# EAGLE board TopPanelV3.2 (EAGLE 7.3.0)
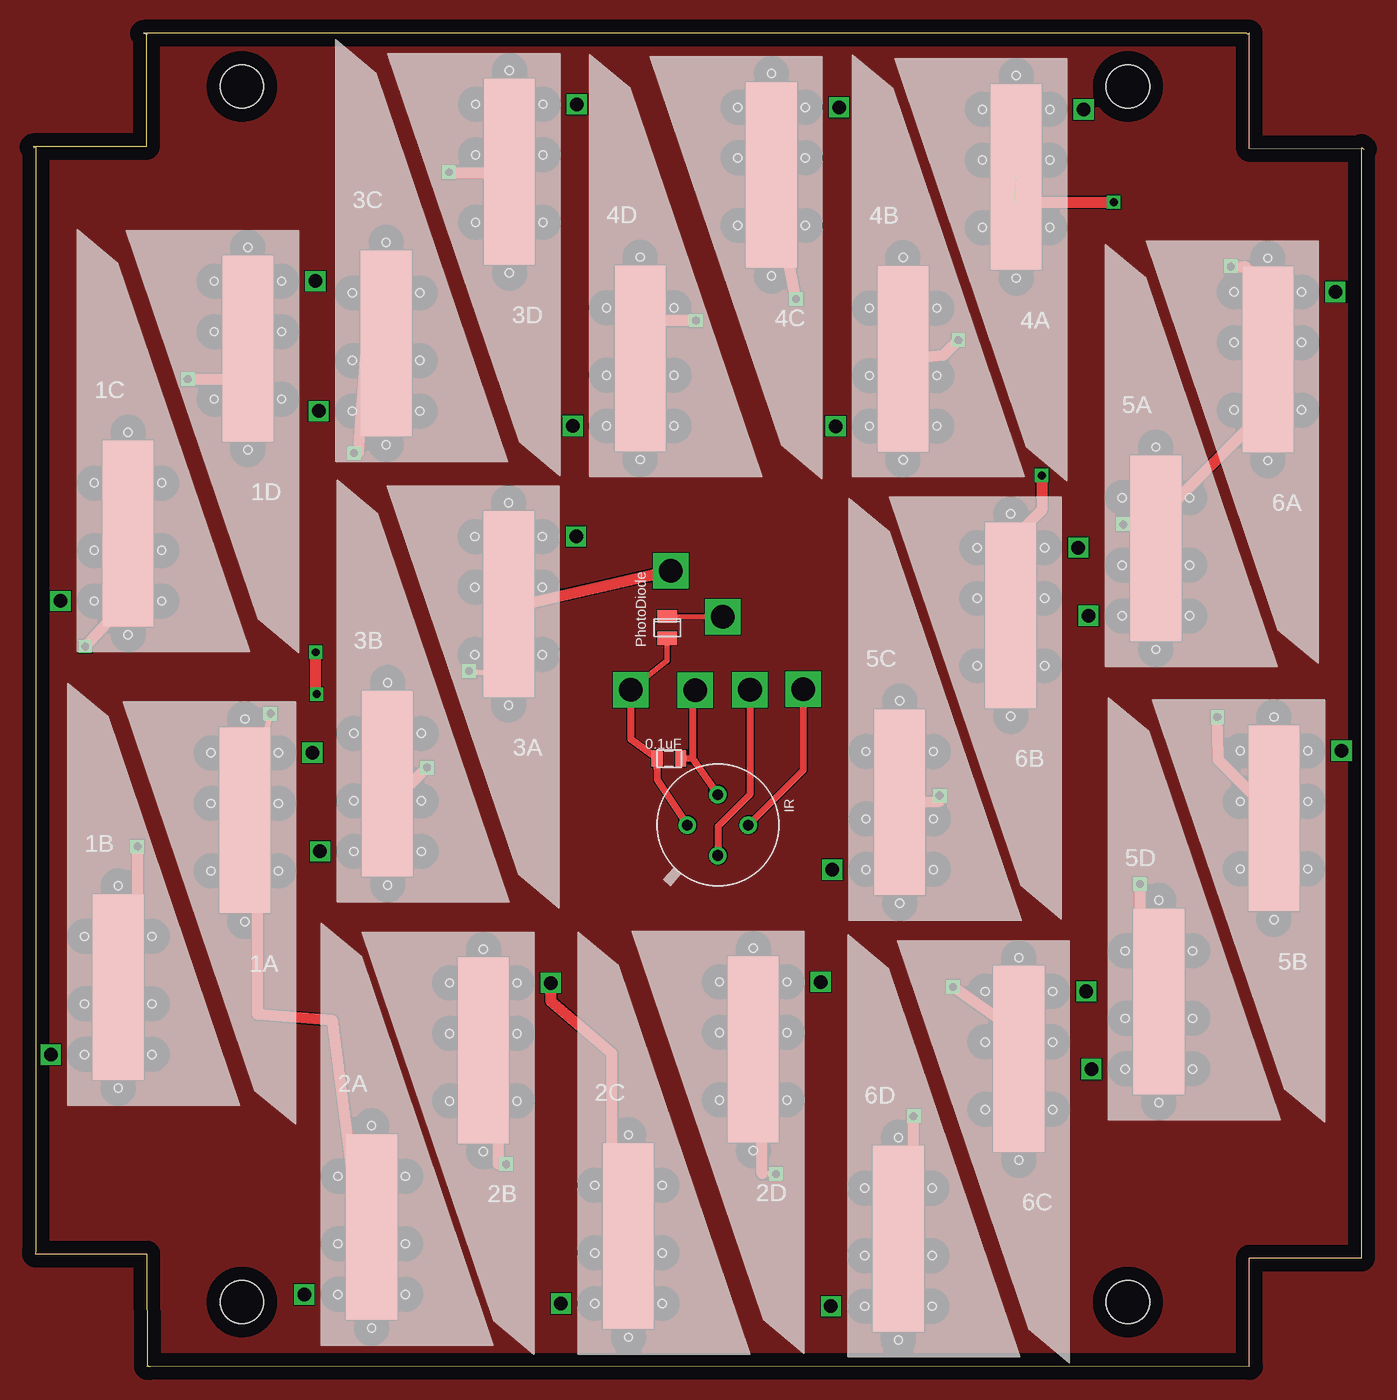
[diagram p0: board, top side]
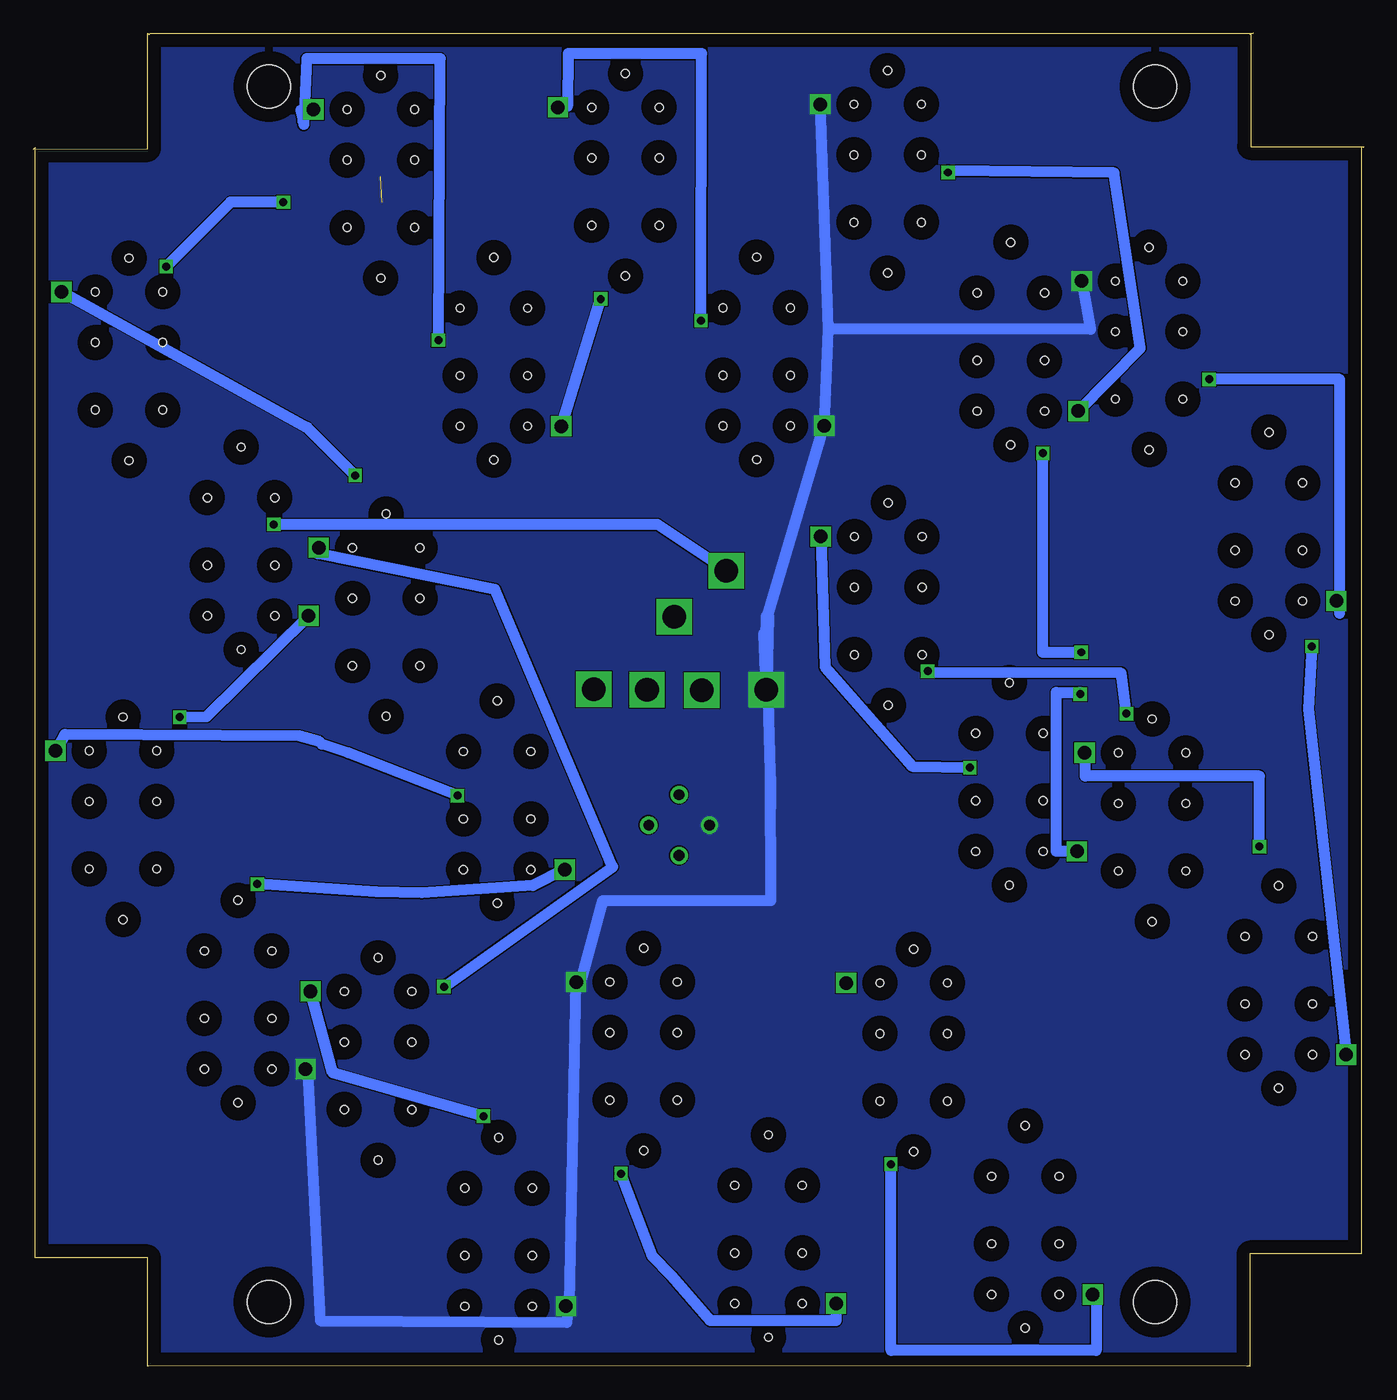
[diagram p1: board, bottom side, seen from below]

Size 100.15 x 100.35 mm. Coordinates in mm from the lower left corner, seen from the top.
Outline: 100,8.15 91.54,8.15 91.54,0 91.49,0.05 8.79,0 8.66,0 8.64,0.02 8.61,0.02 8.59,0 8.56,8.46 0.75,8.46 0.45,8.45 0.17,8.46 0.18,8.66 0.18,91.82 0.05,91.72 0.05,91.75 0,91.8 8.51,91.81 8.49,100.32 8.53,100.28 8.59,100.28 8.31,100.33 91.34,100.33 91.39,100.28 91.47,100.28 91.53,100.34 91.54,91.66 100.15,91.62
Outline: 100,8.15 100,8.15
Outline: 100,8.15 100,91.75 100.15,91.62
Outline: 100.15,91.62 100.15,91.62
Copper layers (1*16): Top 0.035mm / dielectric 1.5mm / Bottom 0.035mm
Design rules "default *": minimum track width 40mil, minimum drill 24mil, track to track 2mil, track to pad 2mil, pad to pad 8mil, via to via 8mil, smd to smd 8mil, copper to edge 40mil, drill to drill 8mil, minimum pad ring 10mil, minimum via ring 8mil, stop-mask expansion 4mil, vias tented up to drill 0mil, thermal gap 10mil
Holes 3.26 mm at 15.7,4.83 82.4,4.83 82.4,96.33 15.7,96.33

## Footprints (pad centres in the part's own frame; a part is rotated, then mirrored left to right if it is on the bottom)
SOLARCELL = smd 3.81 x 13.97: ANODE 5.08,10.16 | drill 1.016 square: CATHODE 0,5.08 | hole 0.6: 7.62,5.08; 5.08,2.54; 7.62,8.89; 5.08,17.78; 2.54,13.97; 2.54,8.89; 7.62,13.97; 2.54,5.08
0805 = smd 0.8 x 1.2: 1 -0.9,0; 2 0.9,0
MXL90614 = drill 0.8: SCL 2.293,0; VDD -2.293,0; VSS 0,-2.294 | drill 0.8 pad 1.2: SDA 0,2.294
PHOTODECTORDEVICE2 = smd 1 x 1.45: GND 0.76,0.4; PWROUT -0.88,0.4

## Placement (x,y rotation side)
1A  SOLARCELL  [SOLARCELL]  21.01,51.26 180 top
1B  SOLARCELL  [SOLARCELL]  1.32,18.39 0 top
1C  SOLARCELL  [SOLARCELL]  2.06,52.53 0 top
1D  SOLARCELL  [SOLARCELL]  21.23,86.77 180 top
2A  SOLARCELL  [SOLARCELL]  20.4,0.33 0 top
2B  SOLARCELL  [SOLARCELL]  38.96,33.93 180 top
2C  SOLARCELL  [SOLARCELL]  39.73,-0.36 0 top
2D  SOLARCELL  [SOLARCELL]  59.28,34.01 180 top
3A  SOLARCELL  [SOLARCELL]  40.87,67.54 180 top
3B  SOLARCELL  [SOLARCELL]  21.59,33.68 0 top
3C  SOLARCELL  [SOLARCELL]  21.49,66.83 0 top
3D  SOLARCELL  [SOLARCELL]  40.92,100.08 180 top
4A  SOLARCELL  [SOLARCELL]  79.07,99.69 180 top
4B  SOLARCELL  [SOLARCELL]  60.4,65.68 0 top
4C  SOLARCELL  [SOLARCELL]  60.66,99.85 180 top
4D  SOLARCELL  [SOLARCELL]  40.61,65.71 0 top
5A  SOLARCELL  [SOLARCELL]  79.43,51.41 0 top
5B  SOLARCELL  [SOLARCELL]  98.48,51.41 180 top
5C  SOLARCELL  [SOLARCELL]  60.15,32.31 0 top
5D  SOLARCELL  [SOLARCELL]  79.65,17.3 0 top
6A  SOLARCELL  [SOLARCELL]  98.02,85.95 180 top
6B  SOLARCELL  [SOLARCELL]  78.66,66.7 180 top
6C  SOLARCELL  [SOLARCELL]  79.27,33.3 180 top
6D  SOLARCELL  [SOLARCELL]  60.05,-0.56 0 top
C1  0.1uF  [0805]  47.85,45.75 0 top
IR  MXL90620  [MXL90614]  51.54,40.74 270 top
U$1  PHOTODETECTOR  [PHOTODECTORDEVICE2]  47.32,55.55 270 top

## Library data of the parts
1A 1B 1C 1D 2A 2B 2C 2D 3A 3B 3C 3D 4A 4B 4C 4D 5A 5B 5C 5D 6A 6B 6C 6D = SolarCellTASCMirror
C1 IR = CNTRL_BOARD
U$1 = solarcellnew

## Nets
3V3: C1.2 IR.VDD
GND: 1D.CATHODE 2D.CATHODE 3D.CATHODE 4D.CATHODE 5D.CATHODE 6D.CATHODE C1.1 IR.VSS U$1.GND
N$1: 1A.CATHODE 1B.ANODE
N$2: 1C.CATHODE 1D.ANODE
N$3: 2A.CATHODE 2B.ANODE
N$4: 2C.CATHODE 2D.ANODE
N$5: 3C.CATHODE 3D.ANODE
N$6: 4A.CATHODE 4B.ANODE
N$7: 4C.CATHODE 4D.ANODE
N$8: 5A.CATHODE 5B.ANODE
N$9: 5C.CATHODE 5D.ANODE
N$10: 6A.CATHODE 6B.ANODE
N$11: 6C.CATHODE 6D.ANODE
N$12: 1B.CATHODE 1C.ANODE
N$13: 2B.CATHODE 2C.ANODE
N$14: 3A.CATHODE 3B.ANODE
N$15: 3B.CATHODE 3C.ANODE
N$16: 4B.CATHODE 4C.ANODE
N$17: 5B.CATHODE 5C.ANODE
N$18: 6B.CATHODE 6C.ANODE
PANELOUT: 1A.ANODE 2A.ANODE 3A.ANODE 4A.ANODE 5A.ANODE 6A.ANODE
PDOUT: U$1.PWROUT
SCL: IR.SCL
SDA: IR.SDA

## Tracks (layer width: path | path; a pad name or v marks a point on that pad's centre or on a via)
3V3  (via drill 1.78)
  Top 0.508: IR.VDD 49.66,45.71 | 49.66,45.71 C1.2 | 49.66,45.71 49.66,50.7 v49.84,50.88
GND  (via drill 1.78)
  Top 0.406: U$1.GND 47.73,53.11 v44.98,50.93
  Top 0.508: v44.98,50.93 44.98,47.19 C1.1 46.98,44.15 IR.VSS
  Bottom 0.406: 44.83,51.56 44.65,51.31 44.93,51.31 45.24,51.31 44.98,51.51 | 44.63,44.04 44.65,44.04 44.65,44.09 | 44.65,44.09 44.63,44.09 | 44.63,44.09 44.53,44.09 44.53,44.55 44.55,44.55 44.55,45.11 44.63,45.11 44.63,44.09 | 44.65,44.09 44.76,44.3 44.76,43.92 | 6D.CATHODE 59.82,4.85 59.77,4.72 | 5D.CATHODE 79.48,22.25 | v44.98,50.93 45.05,51.1 45.07,55.14
  Bottom 0.813: 44.63,42.06 44.63,44.04 44.66,44.7 | 44.66,44.7 44.83,51.56 | 3D.CATHODE 40.31,78.05 | 40.31,78.05 4D.CATHODE 44.88,56.44 | 59.77,4.72 2D.CATHODE 58.9,28.98 57.28,35.05 44.64,35.05 44.66,44.7 | 79.48,22.25 78.56,3.44 59.99,3.31 59.82,4.85 | 1D.CATHODE 20.57,78.05 40.31,78.05
  Bottom 1.016: 45.03,51.46 44.98,51.51 44.88,56.44 | 44.93,51.31 45.07,55.14
  pour Bottom (isolate 0.1, no thermals): -6.1,114.03 113.7,114.03 113.7,-19.97 -6.1,-19.97
N$1  (via drill 0.6)
  Top 0.406: 1B.ANODE 7.85,27.76
  Top 0.813: 7.85,27.76 v7.85,39.12
  Bottom 0.813: v7.85,39.12 7.85,44.42 20.95,44.42 20.95,46.28 1A.CATHODE
N$2  (via drill 0.6)
  Top 0.406: 15.49,74.3 1D.ANODE
  Top 0.813: v11.63,74.3 15.49,74.3
  Bottom 0.406: 1C.CATHODE 1.8,56.67
  Bottom 0.813: 1.8,56.67 1.8,74.3 v11.63,74.3
N$3  (via drill 0.6)
  Top 0.406: v35.59,15.22 35.03,15.22 | 35.03,23.62 33.88,23.62 2B.ANODE
  Top 0.813: 35.03,15.22 35.03,23.62
  Bottom 0.406: 2A.CATHODE 20.14,5.08
  Bottom 0.813: 20.14,5.08 20.14,1.19 35.59,1.19 v35.59,15.22
N$4  (via drill 0.6)
  Top 0.406: v55.91,14.5 54.86,14.5 | 54.86,21.82 53.8,21.82 2D.ANODE
  Top 0.813: 54.86,14.5 54.86,21.82
  Bottom 0.813: v55.91,14.5 53.54,8.28 52.09,6.81 49.17,3.43 39.73,3.43 2C.CATHODE
N$5  (via drill 0.6)
  Top 0.406: 35.18,89.86 3D.ANODE
  Top 0.813: v31.29,89.86 35.18,89.86
  Bottom 0.406: 31.29,89.99 v31.29,89.86
  Bottom 0.813: 3C.CATHODE 16.82,76.63 18.8,89.84 31.29,89.99
N$6  (via drill 0.6)
  Top 0.813: 4B.ANODE 68.5,76.1 v69.65,77.24
  Bottom 0.406: 79.78,93.47 80.06,93.67
  Bottom 0.7: 79.78,93.47 80.06,94.59 4A.CATHODE
  Bottom 0.813: v69.65,77.24 69.52,98.42 79.55,98.42 79.78,93.47
N$7  (via drill 0.6)
  Top 0.406: 47.47,78.72 4D.ANODE
  Top 0.813: v49.89,78.72 47.47,78.72
  Bottom 0.813: v49.89,78.72 49.84,98.81 59.89,98.81 59.94,94.84 4C.CATHODE
N$8  (via drill 0.6)
  Top 0.406: 5B.ANODE 93.62,40.79 93.85,40.56 93.85,41 | 89.2,45.64 89.2,45.92
  Top 0.813: 93.85,41 89.2,45.64 | 89.2,45.92 v89.13,48.87
  Bottom 0.813: v89.13,48.87 87.1,48.89 5A.CATHODE
N$9  (via drill 0.6)
  Top 0.406: 83.34,26.82 84.81,26.82 5D.ANODE
  Top 0.813: v83.29,36.3 83.34,26.82
  Bottom 0.406: 83.29,36.5 v83.29,36.3
  Bottom 0.813: 5C.CATHODE 62.53,36.19 70.92,35.64 74.32,35.71 v83.29,36.3
N$10  (via drill 0.6)
  Top 0.406: 72.95,61.47 72.95,57.71 6B.ANODE
  Top 0.813: v75.92,67.06 75.92,64.44 72.95,61.47
  Bottom 0.813: 6A.CATHODE 79.53,70.66 v75.92,67.06
N$11  (via drill 0.6)
  Top 0.406: 6D.ANODE 66.24,9.83
  Top 0.813: 66.24,9.83 v66.27,18.82
  Bottom 0.813: v66.27,18.82 77.6,22.1 6C.CATHODE
N$12  (via drill 0.6)
  Top 0.406: 1C.ANODE 6.48,61.59 5.71,61.59 5.71,56.34 5.94,56.41
  Top 0.813: 5.94,56.41 v3.91,54.18
  Bottom 0.813: v3.91,54.18 4.17,49.48 1B.CATHODE
N$13
  Top 0.406: 2C.ANODE 43.56,6.27
  Top 0.813: 43.56,6.27 43.56,23.55 38.96,27.48 2B.CATHODE
N$14  (via drill 0.6)
  Top 0.406: 28.42,43.84 3B.ANODE
  Top 0.813: v29.64,45.06 28.42,43.84
  Bottom 0.813: 3A.CATHODE 40.54,52.65 33.98,45.16 v29.64,45.06
N$15  (via drill 0.6)
  Top 0.406: v21.34,50.6 21.26,50.6 | 25.04,76.3 26.19,76.3 3C.ANODE
  Top 0.813: 21.26,50.6 v21.26,53.75 | v24.16,68.73 24.51,68.81 25.04,76.3
  Bottom 0.406: 21.34,50.72 v21.34,50.6
  Bottom 0.813: 3B.CATHODE 23.14,38.76 23.14,50.72 21.34,50.72 | v21.26,53.75 24.16,53.75 v24.16,68.73
N$16  (via drill 0.6)
  Top 0.813: v57.43,80.34 4C.ANODE
  Bottom 0.813: 4B.CATHODE v57.43,80.34
N$17  (via drill 0.6)
  Top 0.406: 68.22,42.52 v68.22,42.95
  Top 0.813: 5C.ANODE 68.22,42.52
  Bottom 0.406: 78.44,46.84 78.61,47.02
  Bottom 0.813: v68.22,42.95 76.43,46.18 78.44,46.84 | 78.61,47.02 80.14,47.45 97.77,47.57 5B.CATHODE
N$18  (via drill 0.6)
  Top 0.406: 6C.ANODE 74.68,25.2
  Top 0.813: 74.68,25.2 74.68,25.55 72.67,26.14 v69.24,28.58
  Bottom 0.813: v69.24,28.58 56.54,37.59 65.41,58.47 78.74,61.16 6B.CATHODE
PANELOUT  (via drill 0.6, 1.78)  (1 unrouted)
  Top 0.406: 2A.ANODE 24.66,9.75 | 16.89,41.07 15.9,41.07 1A.ANODE v17.86,49.12 | v32.82,52.32 35.53,51.94 3A.ANODE 35.89,57.1 | 5A.ANODE 84.84,63.86 84.84,64.01 | 93.04,72.21 92.99,72.28 | 92.99,72.28 92,73.74 | 92.08,81.89 92.46,81.53 92.99,81.53 92.99,75.79 | 6A.ANODE 92.99,75.79 | 92.99,75.79 92.99,72.28
  Top 0.813: 24.66,9.75 22.53,26.03 16.89,26.49 16.89,41.07 | 84.84,64.01 93.04,72.21 | 35.89,57.1 v47.98,59.89 | v82.04,63.37 82.6,63.42 84.84,63.86 | 73.89,87.63 v81.33,87.63 | v90.14,82.78 91.21,82.78 92.46,81.53
  Bottom 0.406: 32.77,52.22 v32.82,52.32
  Bottom 0.813: v17.86,49.12 18.26,52.17 32.77,52.22 | v47.98,59.89 53.16,63.37 v82.04,63.37 | v81.33,87.63 85.29,87.63 v90.14,82.78
PDOUT  (via drill 1.78)
  Top 0.406: v51.89,56.41 U$1.PWROUT
PWR
  pour Top (isolate 0.1, no thermals): -12.8,105.53 107,105.53 107.3,-3.57 -12.5,-3.57
SCL  (via drill 1.78)
  Top 0.508: v53.95,50.93 53.95,43.03 51.56,40.64 51.56,38.47 IR.SCL
SDA  (via drill 1.78)
  Top 0.508: IR.SDA 57.96,44.87 v57.96,50.95

## Text on the board
tPlace: PhotoDiode
Document: EquiSat / Top Panel V 3.2 / Anand Lalwani and Ryan Izant | EquiSat / Top Panel V 3.2 / Anand Lalwani and Ryan Izant | PWR | PWR | PDOut | PDOut | 3V3 | 3V3 | SDA | SDA | GND | GND | SCL | SCL